# Allegro board 111.brd
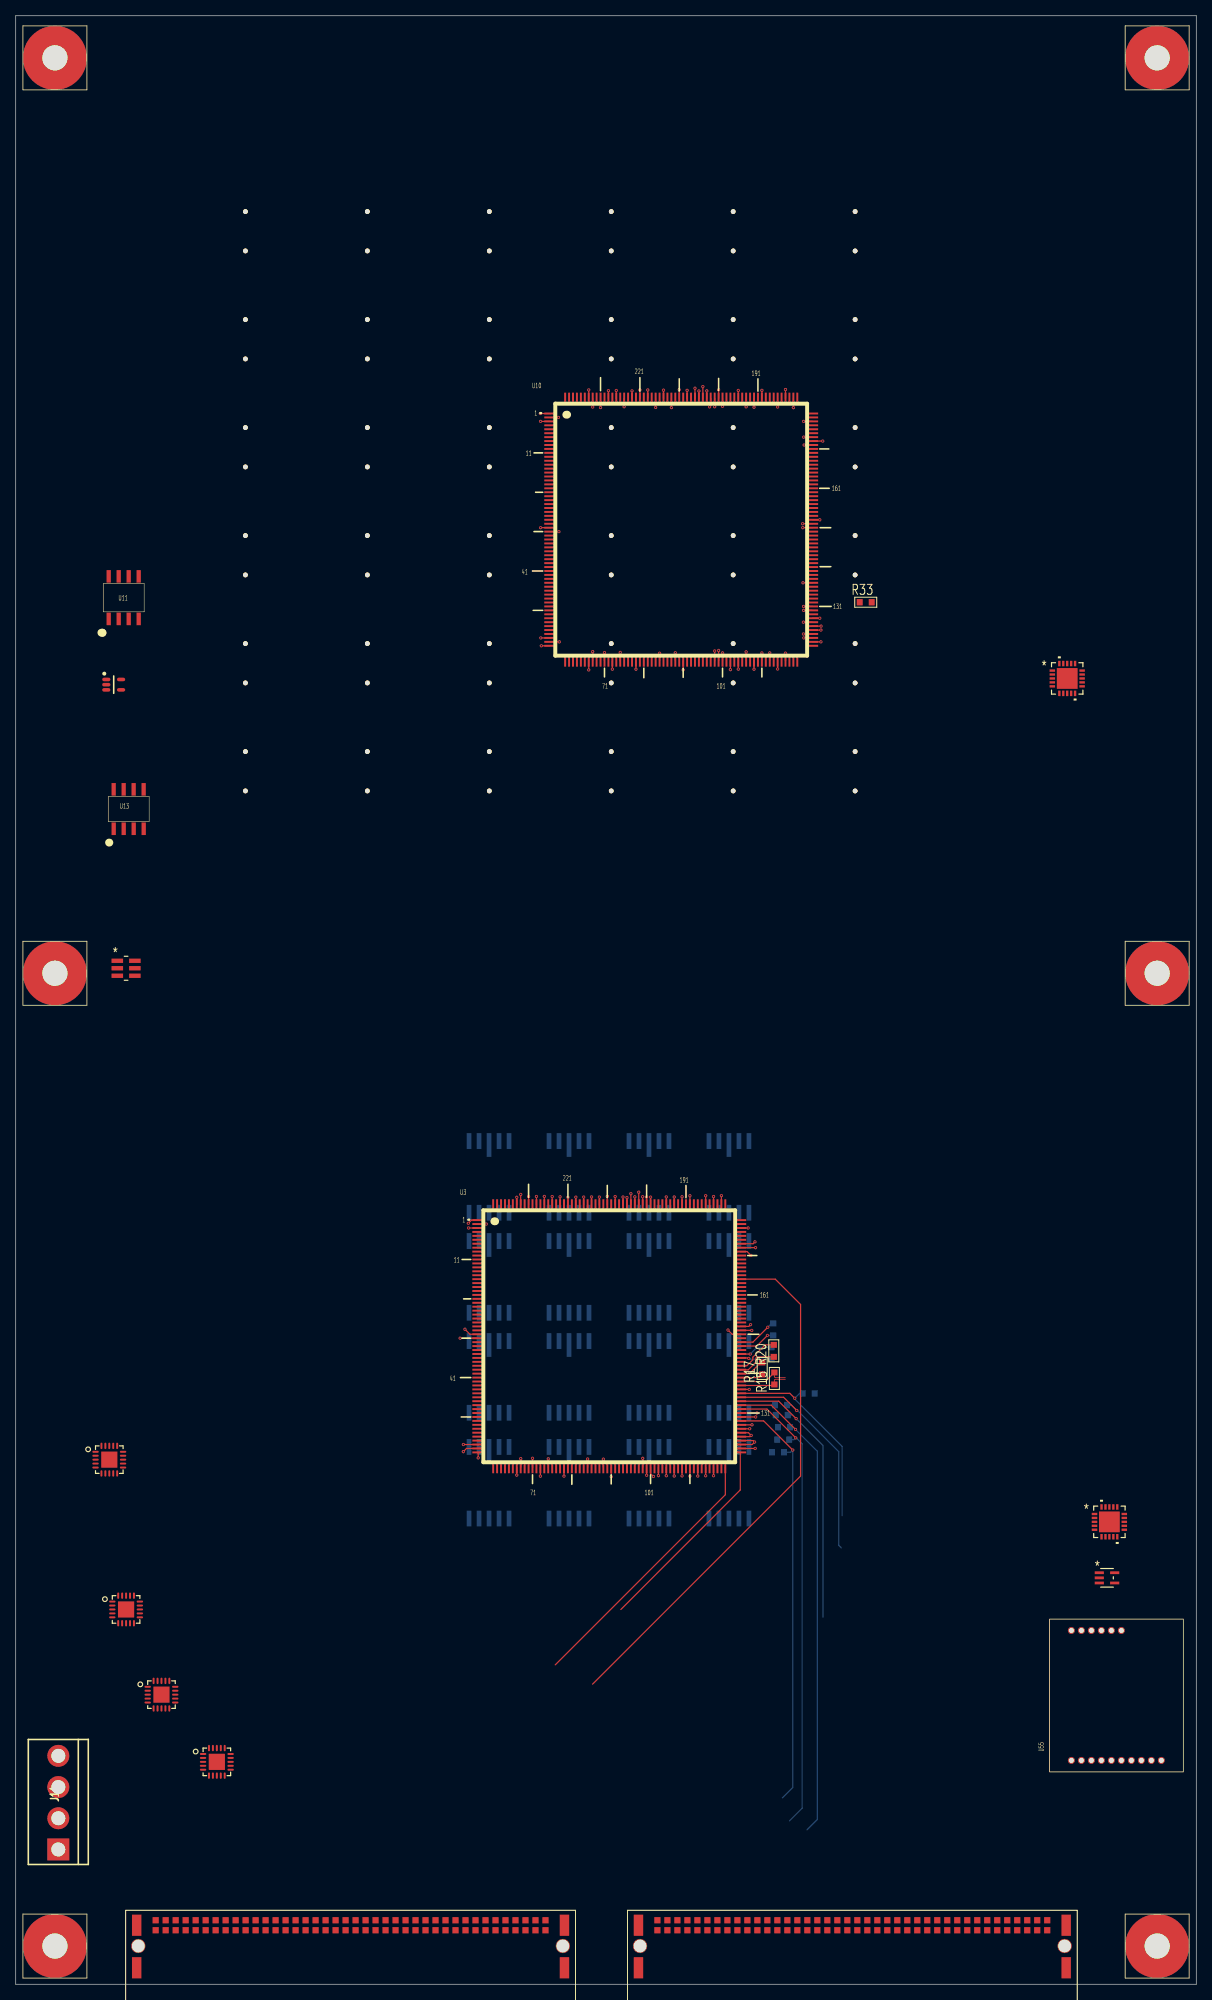
[diagram p0: board, top side]
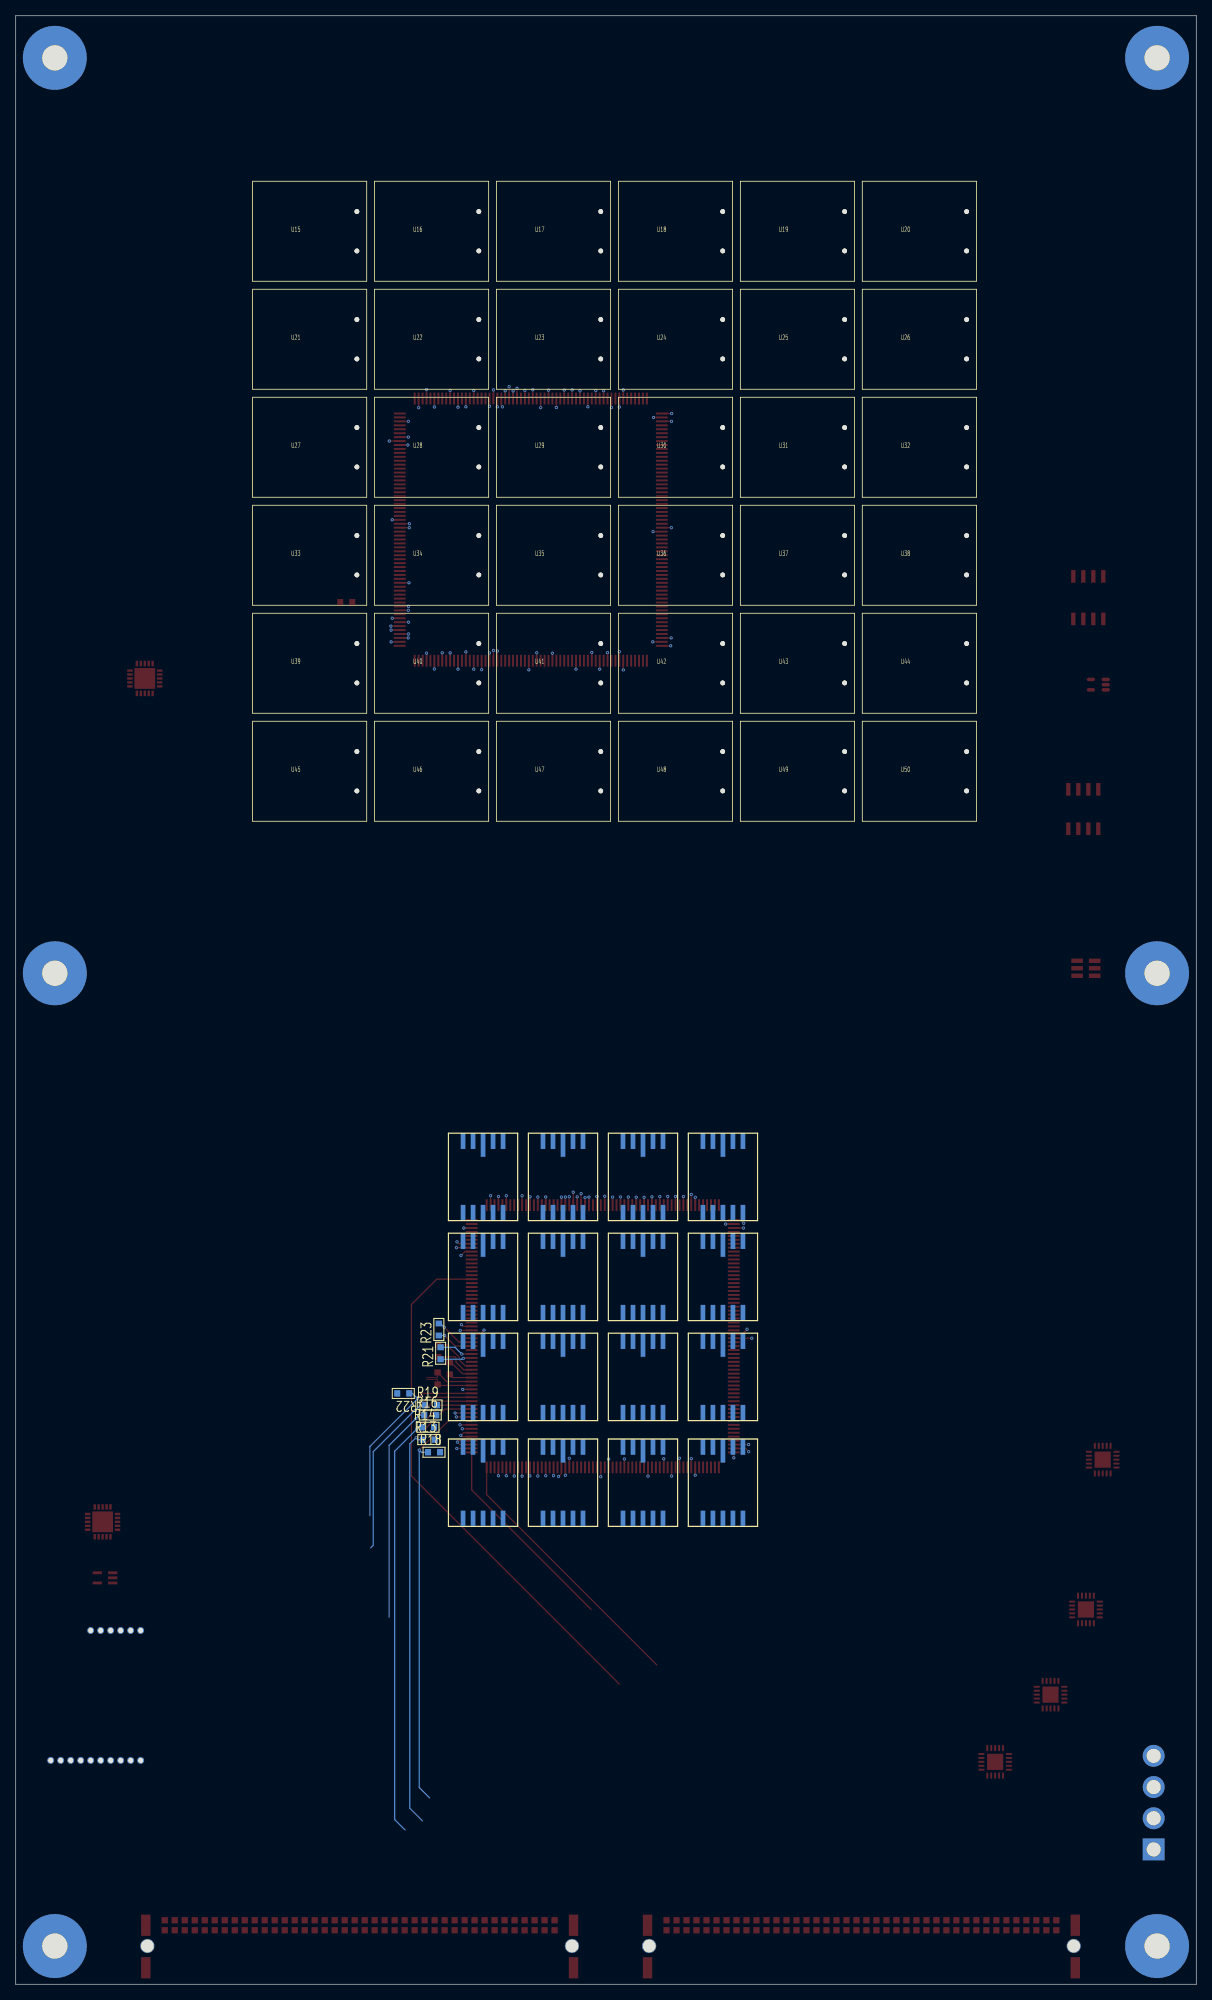
[diagram p1: board, bottom side, seen from below]

Outline 150 x 250 mm; copper layers: TOP, GND2, SIG3, PLANE4, PLANE5, SIG6, GND7, BOTTOM. Coordinates in mm from the lower left corner of the outline.
Outline path: 0,250 0,0 150,0 150,250 0,250

## Design rules (mm)
net group CK_5: nets N36210 N36222
net group CK_40: nets N36234 N36246
net group RAZ_CHN: nets N36138 N36150
net group TRIG_EXT: nets N36186 N36198

## Placement (name value [footprint] x y rotation side)
D1  -  [S5980]  64.54 97.23 180 bottom
D2  -  [S5980]  74.7 97.23 180 bottom
D3  -  [S5980]  84.86 97.23 180 bottom
D4  -  [S5980]  95.02 97.23 180 bottom
D7  -  [S5980]  64.54 84.53 180 bottom
D8  -  [S5980]  74.7 84.53 180 bottom
D9  -  [S5980]  84.86 84.53 180 bottom
D10  -  [S5980]  95.02 84.53 180 bottom
D13  -  [S5980]  64.54 71.83 180 bottom
D14  -  [S5980]  74.7 71.83 180 bottom
D15  -  [S5980]  84.86 71.83 180 bottom
D16  -  [S5980]  95.02 71.83 180 bottom
D17  -  [S5980]  64.54 58.39 180 bottom
D18  -  [S5980]  74.7 58.39 180 bottom
D19  -  [S5980]  84.86 58.39 180 bottom
D20  -  [S5980]  95.02 58.39 180 bottom
J10  CONN  [154744-ERNI]  131.06 6.86 270 top
J11  Power In  [SIP-4P-156]  5.41 23.06 90 top
J12  CONN  [154744-ERNI]  67.31 6.86 270 top
J14  2mm_Hole  [2MM_HOLE]  4.98 4.85 0 top
J15  2mm_Hole  [2MM_HOLE]  145.03 4.85 0 top
J16  2mm_Hole  [2MM_HOLE]  4.98 128.4 0 top
J17  2mm_Hole  [2MM_HOLE]  4.98 244.65 0 top
J18  2mm_Hole  [2MM_HOLE]  145.03 128.4 0 top
J19  2mm_Hole  [2MM_HOLE]  145.03 244.65 0 top
R13  50  [SR0603]  97.51 69.16 180 bottom
R14  50  [SR0603]  97.61 70.74 180 bottom
R15  test  [SR0603]  96.39 76.94 90 top
R16  50  [SR0603]  97.33 72.29 180 bottom
R17  test  [SR0603]  94.84 78.21 90 top
R18  50  [SR0603]  96.85 67.56 180 bottom
R19  50  [SR0603]  97.23 73.56 180 bottom
R20  test  [SR0603]  96.32 80.44 90 top
R21  test  [SR0603]  96.01 80.14 90 bottom
R22  50  [SR0603]  100.76 75.03 0 bottom
R23  test  [SR0603]  96.24 83.16 90 bottom
R33  test  [SR0603]  108 175.51 0 top
U1  Value  [AD7944]  133.6 165.84 0 top
U2  Value  [AD7944]  138.96 58.72 0 top
U3  -  [SKIROC2]  75.41 82.3 0 top
U10  -  [SKIROC2]  84.56 184.73 0 top
U11  TLV5618AM  [TLV5618_D_DFP]  13.72 176.1 0 top
U12  ADG741  [SOT65P210X110-5N]  12.45 165.05 0 top
U13  LM6142AMJ-QML  [LM6142_DFP]  14.35 149.25 0 top
U14  REF3212  [DBV6]  14.02 129.03 0 top
U15  -  [S8650]  106.65 222.63 180 bottom
U16  -  [S8650]  91.16 222.63 180 bottom
U17  -  [S8650]  75.67 222.63 180 bottom
U18  -  [S8650]  60.17 222.63 180 bottom
U19  -  [S8650]  44.68 222.63 180 bottom
U20  -  [S8650]  29.18 222.63 180 bottom
U21  -  [S8650]  106.65 208.91 180 bottom
U22  -  [S8650]  91.16 208.91 180 bottom
U23  -  [S8650]  75.67 208.91 180 bottom
U24  -  [S8650]  60.17 208.91 180 bottom
U25  -  [S8650]  44.68 208.91 180 bottom
U26  -  [S8650]  29.18 208.91 180 bottom
U27  -  [S8650]  106.65 195.2 180 bottom
U28  -  [S8650]  91.16 195.2 180 bottom
U29  -  [S8650]  75.67 195.2 180 bottom
U30  -  [S8650]  60.17 195.2 180 bottom
U31  -  [S8650]  44.68 195.2 180 bottom
U32  -  [S8650]  29.18 195.2 180 bottom
U33  -  [S8650]  106.65 181.48 180 bottom
U34  -  [S8650]  91.16 181.48 180 bottom
U35  -  [S8650]  75.67 181.48 180 bottom
U36  -  [S8650]  60.17 181.48 180 bottom
U37  -  [S8650]  44.68 181.48 180 bottom
U38  -  [S8650]  29.18 181.48 180 bottom
U39  -  [S8650]  106.65 167.77 180 bottom
U40  -  [S8650]  91.16 167.77 180 bottom
U41  -  [S8650]  75.67 167.77 180 bottom
U42  -  [S8650]  60.17 167.77 180 bottom
U43  -  [S8650]  44.68 167.77 180 bottom
U44  -  [S8650]  29.18 167.77 180 bottom
U45  -  [S8650]  106.65 154.05 180 bottom
U46  -  [S8650]  91.16 154.05 180 bottom
U47  -  [S8650]  75.67 154.05 180 bottom
U48  -  [S8650]  60.17 154.05 180 bottom
U49  -  [S8650]  44.68 154.05 180 bottom
U50  -  [S8650]  29.18 154.05 180 bottom
U51  -  [TPS7A85]  11.89 66.62 0 top
U52  -  [TPS7A85]  14.02 47.6 0 top
U53  -  [TPS7A85]  25.55 28.24 0 top
U54  -  [TPS7A85]  18.52 36.78 0 top
U55  C11204-01  [C11204_01]  148.36 26.97 90 top
U56  LM94021  [MAA05A]  138.66 51.61 0 top

## Library data of the parts
D1-D4 D7-D10 D13-D20 = Si_Pin detector
J10 J12 = CONN_1
J11 = 4 HEADER
J14-J19 = 2mm_Hole
R13-R23 R33 = R
U1 U2 = AD7944BCPZ
U3 U10 = SKIROC2
U11 = TLV5618
U12 = ADG741_3: room: MAIN_CH2
U13 = LM6142
U14 = REF3212
U15-U50 = S8650
U51-U54 = TPS7A85
U55 = C11204-01
U56 = LM94021

## Footprints (pads in the part's own frame, mm; a bottom-side part is the same pattern mirrored in y, then rotated)
2MM_HOLE
  round 8.128 hole 3.2: 1(0,0)
154744-ERNI
  rect 2.7x1.199 smd: 1(-0.635,2.41) 2(4.765,2.41) 3(-0.635,-51.94) 4(4.765,-51.94)
  round 1.801 hole 1.6: 5(2,2.21) 6(2,-51.74)
  rect 0.8x0.8 smd: A1(0,0) A2(0,-1.27) A3(0,-2.54) A4(0,-3.81) A5(0,-5.08) A6(0,-6.35) A7(0,-7.62) A8(0,-8.89) A9(0,-10.16) A10(0,-11.43) A11(0,-12.7) A12(0,-13.97) A13(0,-15.24) A14(0,-16.51) A15(0,-17.78) A16(0,-19.05) A17(0,-20.32) A18(0,-21.59) A19(0,-22.86) A20(0,-24.13) A21(0,-25.4) A22(0,-26.67) A23(0,-27.94) A24(0,-29.21) A25(0,-30.48) A26(0,-31.75) A27(0,-33.02) A28(0,-34.29) A29(0,-35.56) A30(0,-36.83) A31(0,-38.1) A32(0,-39.37) A33(0,-40.64) A34(0,-41.91) A35(0,-43.18) A36(0,-44.45) A37(0,-45.72) A38(0,-46.99) A39(0,-48.26) A40(0,-49.53) B1(-1.27,0) B2(-1.27,-1.27) B3(-1.27,-2.54) B4(-1.27,-3.81) B5(-1.27,-5.08) B6(-1.27,-6.35) B7(-1.27,-7.62) B8(-1.27,-8.89) B9(-1.27,-10.16) B10(-1.27,-11.43) B11(-1.27,-12.7) B12(-1.27,-13.97) B13(-1.27,-15.24) B14(-1.27,-16.51) B15(-1.27,-17.78) B16(-1.27,-19.05) B17(-1.27,-20.32) B18(-1.27,-21.59) B19(-1.27,-22.86) B20(-1.27,-24.13) B21(-1.27,-25.4) B22(-1.27,-26.67) B23(-1.27,-27.94) B24(-1.27,-29.21) B25(-1.27,-30.48) B26(-1.27,-31.75) B27(-1.27,-33.02) B28(-1.27,-34.29) B29(-1.27,-35.56) B30(-1.27,-36.83) B31(-1.27,-38.1) B32(-1.27,-39.37) B33(-1.27,-40.64) B34(-1.27,-41.91) B35(-1.27,-43.18) B36(-1.27,-44.45) B37(-1.27,-45.72) B38(-1.27,-46.99) B39(-1.27,-48.26) B40(-1.27,-49.53)
AD7944
  rect 0.701x0.305 smd: 1(-1.892,1.001) 2(-1.892,0.5) 3(-1.892,0) 4(-1.892,-0.5) 5(-1.892,-1.001) 11(1.892,-1.001) 12(1.892,-0.5) 13(1.892,0) 14(1.892,0.5) 15(1.892,1.001)
  rect 0.305x0.701 smd: 6(-1.001,-1.892) 7(-0.5,-1.892) 8(0,-1.892) 9(0.5,-1.892) 10(1.001,-1.892) 16(1.001,1.892) 17(0.5,1.892) 18(0,1.892) 19(-0.5,1.892) 20(-1.001,1.892)
  rect 2.642x2.642 smd: 21(0,0)
C11204_01
  round 0.889 hole 0.635: 1(1.45,2.8) 2(1.45,4.07) 3(1.45,5.34) 4(1.45,6.61) 5(1.45,7.88) 6(1.45,9.15) 7(1.45,10.42) 8(1.45,11.69) 9(1.45,12.96) 10(1.45,14.23) 11(17.95,14.23) 12(17.95,12.96) 13(17.95,11.69) 14(17.95,10.42) 15(17.95,9.15) 16(17.95,7.88)
DBV6
  rect 1.473x0.559 smd: 1(-1.118,0.95) 2(-1.118,0) 3(-1.118,-0.95) 4(1.118,-0.95) 5(1.118,0) 6(1.118,0.95)
LM6142_DFP
  rect 0.55x1.6 smd: 1(-1.905,-2.5) 2(-0.635,-2.5) 3(0.635,-2.5) 4(1.905,-2.5) 5(1.902,2.5) 6(0.632,2.5) 7(-0.638,2.5) 8(-1.908,2.5)
MAA05A
  rect 1.168x0.356 smd: 1(-0.978,0.65) 2(-0.978,0) 3(-0.978,-0.65) 4(0.978,-0.65) 5(0.978,0.65)
S5980
  rect 0.6x2 smd: 1(6.94,9.85) 2(5.67,9.85) 4(3.13,9.85) 5(1.86,9.85) 6(1.86,0.75) 7(3.13,0.75) 8(4.4,0.75) 9(5.67,0.75) 10(6.94,0.75)
  rect 0.6x3 smd: 3(4.4,9.35)
S8650
  round 0.6 hole 0.6: 1(0,-2.5) 2(0,2.5)
SIP-4P-156
  rect 2.794x2.794 hole 1.778: 1(-5.944,0)
  round 2.794 hole 1.778: 2(-1.981,0) 3(1.981,0) 4(5.944,0)
SKIROC2
  rect 1.5x0.25 smd: 1(-16.65,14.75) 2(-16.65,14.25) 3(-16.65,13.75) 4(-16.65,13.25) 5(-16.65,12.75) 6(-16.65,12.25) 7(-16.65,11.75) 8(-16.65,11.25) 9(-16.65,10.75) 10(-16.65,10.25) 11(-16.65,9.75) 12(-16.65,9.25) 13(-16.65,8.75) 14(-16.65,8.25) 15(-16.65,7.75) 16(-16.65,7.25) 17(-16.65,6.75) 18(-16.65,6.25) 19(-16.65,5.75) 20(-16.65,5.25) 21(-16.65,4.75) 22(-16.65,4.25) 23(-16.65,3.75) 24(-16.65,3.25) 25(-16.65,2.75) 26(-16.65,2.25) 27(-16.65,1.75) 28(-16.65,1.25) 29(-16.65,0.75) 30(-16.65,0.25) 31(-16.65,-0.25) 32(-16.65,-0.75) 33(-16.65,-1.25) 34(-16.65,-1.75) 35(-16.65,-2.25) 36(-16.65,-2.75) 37(-16.65,-3.25) 38(-16.65,-3.75) 39(-16.65,-4.25) 40(-16.65,-4.75) 41(-16.65,-5.25) 42(-16.65,-5.75) 43(-16.65,-6.25) 44(-16.65,-6.75) 45(-16.65,-7.25) 46(-16.65,-7.75) 47(-16.65,-8.25) 48(-16.65,-8.75) 49(-16.65,-9.25) 50(-16.65,-9.75) 51(-16.65,-10.25) 52(-16.65,-10.75) 53(-16.65,-11.25) 54(-16.65,-11.75) 55(-16.65,-12.25) 56(-16.65,-12.75) 57(-16.65,-13.25) 58(-16.65,-13.75) 59(-16.65,-14.25) 60(-16.65,-14.75) 121(16.65,-14.75) 122(16.65,-14.25) 123(16.65,-13.75) 124(16.65,-13.25) 125(16.65,-12.75) 126(16.65,-12.25) 127(16.65,-11.75) 128(16.65,-11.25) 129(16.65,-10.75) 130(16.65,-10.25) 131(16.65,-9.75) 132(16.65,-9.25) 133(16.65,-8.75) 134(16.65,-8.25) 135(16.65,-7.75) 136(16.65,-7.25) 137(16.65,-6.75) 138(16.65,-6.25) 139(16.65,-5.75) 140(16.65,-5.25) 141(16.65,-4.75) 142(16.65,-4.25) 143(16.65,-3.75) 144(16.65,-3.25) 145(16.65,-2.75) 146(16.65,-2.25) 147(16.65,-1.75) 148(16.65,-1.25) 149(16.65,-0.75) 150(16.65,-0.25) 151(16.65,0.25) 152(16.65,0.75) 153(16.65,1.25) 154(16.65,1.75) 155(16.65,2.25) 156(16.65,2.75) 157(16.65,3.25) 158(16.65,3.75) 159(16.65,4.25) 160(16.65,4.75) 161(16.65,5.25) 162(16.65,5.75) 163(16.65,6.25) 164(16.65,6.75) 165(16.65,7.25) 166(16.65,7.75) 167(16.65,8.25) 168(16.65,8.75) 169(16.65,9.25) 170(16.65,9.75) 171(16.65,10.25) 172(16.65,10.75) 173(16.65,11.25) 174(16.65,11.75) 175(16.65,12.25) 176(16.65,12.75) 177(16.65,13.25) 178(16.65,13.75) 179(16.65,14.25) 180(16.65,14.75)
  rect 0.25x1.5 smd: 61(-14.75,-16.65) 62(-14.25,-16.65) 63(-13.75,-16.65) 64(-13.25,-16.65) 65(-12.75,-16.65) 66(-12.25,-16.65) 67(-11.75,-16.65) 68(-11.25,-16.65) 69(-10.75,-16.65) 70(-10.25,-16.65) 71(-9.75,-16.65) 72(-9.25,-16.65) 73(-8.75,-16.65) 74(-8.25,-16.65) 75(-7.75,-16.65) 76(-7.25,-16.65) 77(-6.75,-16.65) 78(-6.25,-16.65) 79(-5.75,-16.65) 80(-5.25,-16.65) 81(-4.75,-16.65) 82(-4.25,-16.65) 83(-3.75,-16.65) 84(-3.25,-16.65) 85(-2.75,-16.65) 86(-2.25,-16.65) 87(-1.75,-16.65) 88(-1.25,-16.65) 89(-0.75,-16.65) 90(-0.25,-16.65) 91(0.25,-16.65) 92(0.75,-16.65) 93(1.25,-16.65) 94(1.75,-16.65) 95(2.25,-16.65) 96(2.75,-16.65) 97(3.25,-16.65) 98(3.75,-16.65) 99(4.25,-16.65) 100(4.75,-16.65) 101(5.25,-16.65) 102(5.75,-16.65) 103(6.25,-16.65) 104(6.75,-16.65) 105(7.25,-16.65) 106(7.75,-16.65) 107(8.25,-16.65) 108(8.75,-16.65) 109(9.25,-16.65) 110(9.75,-16.65) 111(10.25,-16.65) 112(10.75,-16.65) 113(11.25,-16.65) 114(11.75,-16.65) 115(12.25,-16.65) 116(12.75,-16.65) 117(13.25,-16.65) 118(13.75,-16.65) 119(14.25,-16.65) 120(14.75,-16.65) 181(14.75,16.65) 182(14.25,16.65) 183(13.75,16.65) 184(13.25,16.65) 185(12.75,16.65) 186(12.25,16.65) 187(11.75,16.65) 188(11.25,16.65) 189(10.75,16.65) 190(10.25,16.65) 191(9.75,16.65) 192(9.25,16.65) 193(8.75,16.65) 194(8.25,16.65) 195(7.75,16.65) 196(7.25,16.65) 197(6.75,16.65) 198(6.25,16.65) 199(5.75,16.65) 200(5.25,16.65) 201(4.75,16.65) 202(4.25,16.65) 203(3.75,16.65) 204(3.25,16.65) 205(2.75,16.65) 206(2.25,16.65) 207(1.75,16.65) 208(1.25,16.65) 209(0.75,16.65) 210(0.25,16.65) 211(-0.25,16.65) 212(-0.75,16.65) 213(-1.25,16.65) 214(-1.75,16.65) 215(-2.25,16.65) 216(-2.75,16.65) 217(-3.25,16.65) 218(-3.75,16.65) 219(-4.25,16.65) 220(-4.75,16.65) 221(-5.25,16.65) 222(-5.75,16.65) 223(-6.25,16.65) 224(-6.75,16.65) 225(-7.25,16.65) 226(-7.75,16.65) 227(-8.25,16.65) 228(-8.75,16.65) 229(-9.25,16.65) 230(-9.75,16.65) 231(-10.25,16.65) 232(-10.75,16.65) 233(-11.25,16.65) 234(-11.75,16.65) 235(-12.25,16.65) 236(-12.75,16.65) 237(-13.25,16.65) 238(-13.75,16.65) 239(-14.25,16.65) 240(-14.75,16.65)
SOT65P210X110-5N
  oval 1.041x0.457 smd: 1(-0.94,0.66) 2(-0.94,0) 3(-0.94,-0.66) 4(0.94,-0.66) 5(0.94,0.66)
SR0603
  rect 0.762x0.813 smd: 1(-0.762,0) 2(0.762,0)
TLV5618_D_DFP
  rect 0.55x1.6 smd: 1(-1.905,-2.7) 2(-0.635,-2.7) 3(0.635,-2.7) 4(1.905,-2.7) 5(1.905,2.7) 6(0.635,2.7) 7(-0.635,2.7) 8(-1.905,2.7)
TPS7A85
  oval 0.813x0.254 smd: 1(-1.75,1) 2(-1.75,0.5) 3(-1.75,0) 4(-1.75,-0.5) 5(-1.75,-1) 11(1.75,-1) 12(1.75,-0.5) 13(1.75,0) 14(1.75,0.5) 15(1.75,1)
  oval 0.254x0.813 smd: 6(-1,-1.75) 7(-0.5,-1.75) 8(0,-1.75) 9(0.5,-1.75) 10(1,-1.75) 16(1,1.75) 17(0.5,1.75) 18(0,1.75) 19(-0.5,1.75) 20(-1,1.75)
  rect 2.057x2.057 smd: 21(0,0)

## Nets
3.3V_A: U3.73(VDD_BG) U3.79(VDD_DAC) U3.91(VDD_TDC) U3.103(VDD_4BIT) U3.105(VDD_ADC) U3.115(VDD_DISCADC) U3.190(VDD_GS) U3.196(VDD_TRIGGER) U3.204(VDD_SCA) U3.213(VDD_FS) U3.217(VDD_AMP10) U3.223(VDD_SS10) U3.227(VDD_SS1) U10.73(VDD_BG) U10.79(VDD_DAC) U10.91(VDD_TDC) U10.103(VDD_4BIT) U10.105(VDD_ADC) U10.115(VDD_DISCADC) U10.190(VDD_GS) U10.196(VDD_TRIGGER) U10.204(VDD_SCA) U10.213(VDD_FS) U10.217(VDD_AMP10) U10.223(VDD_SS10) U10.227(VDD_SS1) U52.1(OUT#1) U52.19(OUT#19) U52.20(OUT#20)
3.3V_D: U3.109(VDDD_DELAY) U3.125(VDDD_TDC) U3.126(VDDD#126) U3.128(VDDD#128) U3.153(VDDD#153) U3.173(VDD) U3.184(VDD_SC) U3.205(VDDD_SCA) U10.109(VDDD_DELAY) U10.125(VDDD_TDC) U10.126(VDDD#126) U10.128(VDDD#128) U10.153(VDDD#153) U10.173(VDD) U10.184(VDD_SC) U10.205(VDDD_SCA) U11.8(VDD) U12.5(VDD) U13.8(V+) U53.1(OUT#1) U53.19(OUT#19) U53.20(OUT#20)
3.3V_PA: U3.1(VDDA_PA#1) U3.3(VDDA_PA#3) U3.30(VDDA_PA#30) U3.58(VDDA_PA#58) U3.60(VDDA_PA#60) U3.67(VDDA_PA#67) U3.229(VDD_PA) U3.234(VDDA_PA#234) U10.1(VDDA_PA#1) U10.3(VDDA_PA#3) U10.30(VDDA_PA#30) U10.58(VDDA_PA#58) U10.60(VDDA_PA#60) U10.67(VDDA_PA#67) U10.229(VDD_PA) U10.234(VDDA_PA#234) U51.1(OUT#1) U51.19(OUT#19) U51.20(OUT#20)
+1.25V_REF: U11.6(REF) U14.5(OUT1) U14.6(OUT2)
+2.5V_A: R13.2 R14.2 R16.2 R18.2 R19.2 R22.2 U1.8(VIO) U1.11(DVDD) U1.15(TURBO) U1.16(AVDD) U2.8(VIO) U2.11(DVDD) U2.15(TURBO) U2.16(AVDD) U14.3(EN) U14.4(IN) U54.1(OUT#1) U54.19(OUT#19) U54.20(OUT#20)
+5V: U1.19(BVDD) U2.19(BVDD) U51.14(EN) U51.15(IN#15) U51.16(IN#16) U51.17(IN#17) U52.14(EN) U52.15(IN#15) U52.16(IN#16) U52.17(IN#17) U53.14(EN) U53.15(IN#15) U53.16(IN#16) U53.17(IN#17) U54.14(EN) U54.15(IN#15) U54.16(IN#16) U54.17(IN#17) U55.1(VCC)
GND: J10.1(GND#1) J10.2(GND#2) J10.3(GND#3) J10.4(GND#4) J10.5(GND#5) J10.6(GND#6) J10.A1 J10.A3 J10.A5 J10.A7 J10.A9 J10.A11 J10.A13 J10.A16 J10.A19 J10.A21 J10.A23 J10.A25 J10.A27 J10.A29 J10.A31 J10.A32 J10.A35 J10.A36 J10.A39 J10.A40 J10.B2 J10.B4 J10.B6 J10.B8 J10.B10 J10.B12 J10.B13 J10.B14 J10.B17 J10.B18 J10.B20 J10.B22 J10.B24 J10.B26 J10.B28 J10.B30 J10.B33 J10.B34 J10.B37 J10.B38 J11.1 J11.4 J12.1(GND#1) J12.2(GND#2) J12.3(GND#3) J12.4(GND#4) J12.5(GND#5) J12.6(GND#6) J12.A1 J12.A3 J12.A5 J12.A7 J12.A9 J12.A11 J12.A13 J12.A15 J12.A17 J12.A19 J12.A21 J12.A23 J12.A25 J12.A27 J12.A29 J12.A31 J12.A33 J12.A35 J12.A37 J12.A39 J12.B2 J12.B4 J12.B6 J12.B8 J12.B10 J12.B12 J12.B14 J12.B16 J12.B18 J12.B20 J12.B22 J12.B24 J12.B26 J12.B28 J12.B30 J12.B32 J12.B34 J12.B36 J12.B38 J12.B40 J14.1(GND) J15.1(GND) J16.1(GND) J17.1(GND) J18.1(GND) J19.1(GND) U1.3(REGGND) U1.4(REGGND_1) U1.5(IN-) U1.10(DGND) U1.17(AGND) U1.18(AGND_1) U1.21(EP) U2.3(REGGND) U2.4(REGGND_1) U2.5(IN-) U2.10(DGND) U2.17(AGND) U2.18(AGND_1) U2.21(EP) U3.2(VSSI#2) U3.31(VSSI#31) U3.59(VSSI#59) U3.68(VSSA#68) U3.71(GND_PA#71) U3.75(GND_BG) U3.85(GND_DAC) U3.89(GND_TDC) U3.99(VSSA#99) U3.100(VSSM#100) U3.101(GND_4BIT) U3.107(GND_ADC) U3.111(GNDD_DELAY) U3.113(VSSM#113) U3.117(GND_DISCADC) U3.122(VSSM#122) U3.123(VSSD#123) U3.124(GNDD_TDC) U3.127(VSSD#127) U3.130(GNDD_TEST) U3.131(RTN#131) U3.137(RTN#137) U3.151(VSSD) U3.152(GNDD) U3.174(VSSD#174) U3.178(VSSD#178) U3.182(GND_SC) U3.186(VSSM#186) U3.192(GND_GS) U3.194(GND_TRIGGER) U3.200(GND_TEST) U3.201(VSSM#201) U3.202(VSSA#202) U3.206(GNDD_SCA) U3.207(GND_SCA) U3.209(GND_CAPA_SCA_T) U3.211(GND_CAPA_SCA) U3.215(GND_FS) U3.219(GND_AMP10) U3.221(GND_SS10) U3.225(GND_SS1) U3.231(GND_PA#231) U3.233(VSSA#233) U10.2(VSSI#2) U10.31(VSSI#31) U10.59(VSSI#59) U10.68(VSSA#68) U10.71(GND_PA#71) U10.75(GND_BG) U10.85(GND_DAC) U10.89(GND_TDC) U10.99(VSSA#99) U10.100(VSSM#100) U10.101(GND_4BIT) U10.107(GND_ADC) U10.111(GNDD_DELAY) U10.113(VSSM#113) U10.117(GND_DISCADC) U10.122(VSSM#122) U10.123(VSSD#123) U10.124(GNDD_TDC) U10.127(VSSD#127) U10.130(GNDD_TEST) U10.131(RTN#131) U10.137(RTN#137) U10.151(VSSD) U10.152(GNDD) U10.174(VSSD#174) U10.178(VSSD#178) U10.182(GND_SC) U10.186(VSSM#186) U10.192(GND_GS) U10.194(GND_TRIGGER) U10.200(GND_TEST) U10.201(VSSM#201) U10.202(VSSA#202) U10.206(GNDD_SCA) U10.207(GND_SCA) U10.209(GND_CAPA_SCA_T) U10.211(GND_CAPA_SCA) U10.215(GND_FS) U10.219(GND_AMP10) U10.221(GND_SS10) U10.225(GND_SS1) U10.231(GND_PA#231) U10.233(VSSA#233) U11.5(AGND) U12.3(GND) U13.4(V-) U14.1(GND1) U14.2(GND2) U51.8(GND#8) U51.18(GND#18) U51.21(THERMALPAD) U52.8(GND#8) U52.18(GND#18) U52.21(THERMALPAD) U53.8(GND#8) U53.18(GND#18) U53.21(THERMALPAD) U54.8(GND#8) U54.9(400MV) U54.10(800MV) U54.18(GND#18) U54.21(THERMALPAD) U55.2(GND#2) U55.5(GND#5) U55.8(GND#8) U55.15(GND#15) U56.1(GS0) U56.2(GND) U56.5(GS1)
VDD_TEST: U3.203(VDD_TEST) U10.203(VDD_TEST)
VDDD_TEST: U3.172(VDDD_TEST) U10.172(VDDD_TEST)
A_PROBE_SKIROC1: U3.179(A_PROBE)
A_PROBE_SKIROC_2: U10.179(A_PROBE)
CALI_VOL: U12.1(IN)
DACOUTA: U13.3(+INA)
HV_30V: D1.3(CATHODE COMMON) D3.3(CATHODE COMMON) D4.3(CATHODE COMMON) D7.3(CATHODE COMMON) D8.3(CATHODE COMMON) D9.3(CATHODE COMMON) D10.3(CATHODE COMMON) D13.3(CATHODE COMMON) D14.3(CATHODE COMMON) D15.3(CATHODE COMMON) D16.3(CATHODE COMMON) D17.3(CATHODE COMMON) D18.3(CATHODE COMMON) D19.3(CATHODE COMMON) D20.3(CATHODE COMMON)
HV_SIPIN: U15.2(ANODE) U16.2(ANODE) U17.2(ANODE) U18.2(ANODE) U19.2(ANODE) U20.2(ANODE) U21.2(ANODE) U22.2(ANODE) U23.2(ANODE) U24.2(ANODE) U25.2(ANODE) U26.2(ANODE) U27.2(ANODE) U28.2(ANODE) U29.2(ANODE) U30.2(ANODE) U31.2(ANODE) U32.2(ANODE) U33.2(ANODE) U34.2(ANODE) U35.2(ANODE) U36.2(ANODE) U37.2(ANODE) U38.2(ANODE) U39.2(ANODE) U40.2(ANODE) U41.2(ANODE) U42.2(ANODE) U43.2(ANODE) U44.2(ANODE) U45.2(ANODE) U46.2(ANODE) U47.2(ANODE) U48.2(ANODE) U49.2(ANODE) U50.2(ANODE)
IBI_PA_SKIROC1: U3.228(IBI_PA)
IBI_PA_SKIROC_2: U10.228(IBI_PA)
IN_ADC_EXT_SKIROC1: U3.183(IN_ADC_EXT)
IN_ADC_EXT_SKIROC_2: U10.183(IN_ADC_EXT)
SK1_CHN0: D1.10(ANODE A)
SK1_CHN1: D1.1(ANODE B)
SK1_CHN2: D1.5(ANODE C)
SK1_CHN3: D1.6(ANODE D)
SK1_CHN4: D2.10(ANODE A)
SK1_CHN5: D2.1(ANODE B)
SK1_CHN6: D2.5(ANODE C)
SK1_CHN7: D2.6(ANODE D)
SK1_CHN8: D3.10(ANODE A)
SK1_CHN9: D3.1(ANODE B)
SK1_CHN10: D3.5(ANODE C)
SK1_CHN11: D3.6(ANODE D)
SK1_CHN12: D4.10(ANODE A)
SK1_CHN13: D4.1(ANODE B)
SK1_CHN14: D4.5(ANODE C)
SK1_CHN15: D4.6(ANODE D)
SK1_CHN16: D7.10(ANODE A)
SK1_CHN17: D7.1(ANODE B)
SK1_CHN18: D7.5(ANODE C)
SK1_CHN19: D7.6(ANODE D)
SK1_CHN20: D8.10(ANODE A)
SK1_CHN21: D8.1(ANODE B)
SK1_CHN22: D8.5(ANODE C)
SK1_CHN23: D8.6(ANODE D)
SK1_CHN24: D9.10(ANODE A)
SK1_CHN25: D9.1(ANODE B)
SK1_CHN26: D9.5(ANODE C)
SK1_CHN27: D9.6(ANODE D)
SK1_CHN28: D10.10(ANODE A)
SK1_CHN29: D10.1(ANODE B)
SK1_CHN30: D10.5(ANODE C)
SK1_CHN31: D10.6(ANODE D)
SK1_CHN32: D13.10(ANODE A)
SK1_CHN33: D13.1(ANODE B)
SK1_CHN34: D13.5(ANODE C)
SK1_CHN35: D13.6(ANODE D)
SK1_CHN36: D14.10(ANODE A)
SK1_CHN37: D14.1(ANODE B)
SK1_CHN38: D14.5(ANODE C)
SK1_CHN39: D14.6(ANODE D)
SK1_CHN40: D15.10(ANODE A)
SK1_CHN41: D15.1(ANODE B)
SK1_CHN42: D15.5(ANODE C)
SK1_CHN43: D15.6(ANODE D)
SK1_CHN44: D16.10(ANODE A)
SK1_CHN45: D16.1(ANODE B)
SK1_CHN46: D16.5(ANODE C)
SK1_CHN47: D16.6(ANODE D)
SK1_CHN48: D17.10(ANODE A)
SK1_CHN49: D17.1(ANODE B)
SK1_CHN50: D17.5(ANODE C)
SK1_CHN51: D17.6(ANODE D)
SK1_CHN52: D18.10(ANODE A)
SK1_CHN53: D18.1(ANODE B)
SK1_CHN54: D18.5(ANODE C)
SK1_CHN55: D18.6(ANODE D)
SK1_CHN56: D19.10(ANODE A)
SK1_CHN57: D19.1(ANODE B)
SK1_CHN58: D19.5(ANODE C)
SK1_CHN59: D19.6(ANODE D)
SK1_CHN60: D20.10(ANODE A)
SK1_CHN61: D20.1(ANODE B)
SK1_CHN62: D20.5(ANODE C)
SK1_CHN63: D20.6(ANODE D)
SK1_INPUT1: U3.235(IN_0)
SK1_INPUT2: U3.236(IN_1)
SK1_INPUT3: U3.237(IN_2)
SK1_INPUT4: U3.238(IN_3)
SK1_INPUT5: U3.239(IN_4)
SK1_INPUT6: U3.240(IN_5)
SK1_INPUT7: U3.4(IN_6)
SK1_INPUT8: U3.5(IN_7)
SK1_INPUT9: U3.6(IN_8)
SK1_INPUT10: U3.7(IN_9)
SK1_INPUT11: U3.8(IN_10)
SK1_INPUT12: U3.9(IN_11)
SK1_INPUT13: U3.10(IN_12)
SK1_INPUT14: U3.11(IN_13)
SK1_INPUT15: U3.12(IN_14)
SK1_INPUT16: U3.13(IN_15)
SK1_INPUT17: U3.14(IN_16)
SK1_INPUT18: U3.15(IN_17)
SK1_INPUT19: U3.16(IN_18)
SK1_INPUT20: U3.17(IN_19)
SK1_INPUT21: U3.18(IN_20)
SK1_INPUT22: U3.19(IN_21)
SK1_INPUT23: U3.20(IN_22)
SK1_INPUT24: U3.21(IN_23)
SK1_INPUT25: U3.22(IN_24)
SK1_INPUT26: U3.23(IN_25)
SK1_INPUT27: U3.24(IN_26)
SK1_INPUT28: U3.25(IN_27)
SK1_INPUT29: U3.26(IN_28)
SK1_INPUT30: U3.27(IN_29)
SK1_INPUT31: U3.28(IN_30)
SK1_INPUT32: U3.29(IN_31)
SK1_INPUT33: U3.32(IN_32)
SK1_INPUT34: U3.33(IN_33)
SK1_INPUT35: U3.34(IN_34)
SK1_INPUT36: U3.35(IN_35)
SK1_INPUT_CHN63: U3.65(IN_62)
SK1_V_BG: U3.77(V_BG)
SK1_VTH0: U3.104(VTH0)
SK1_VTH1: U3.112(VTH1)
SK2_CHN0: U15.1(CATHODE)
SK2_CHN1: U16.1(CATHODE)
SK2_CHN2: U17.1(CATHODE)
SK2_CHN3: U18.1(CATHODE)
SK2_CHN4: U19.1(CATHODE)
SK2_CHN5: U20.1(CATHODE)
SK2_CHN6: U21.1(CATHODE)
SK2_CHN7: U22.1(CATHODE)
SK2_CHN8: U23.1(CATHODE)
SK2_CHN9: U24.1(CATHODE)
SK2_CHN10: U25.1(CATHODE)
SK2_CHN11: U26.1(CATHODE)
SK2_CHN12: U27.1(CATHODE)
SK2_CHN13: U28.1(CATHODE)
SK2_CHN14: U29.1(CATHODE)
SK2_CHN15: U30.1(CATHODE)
SK2_CHN16: U31.1(CATHODE)
SK2_CHN17: U32.1(CATHODE)
SK2_CHN18: U33.1(CATHODE)
SK2_CHN19: U34.1(CATHODE)
SK2_CHN20: U35.1(CATHODE)
SK2_CHN21: U36.1(CATHODE)
SK2_CHN22: U37.1(CATHODE)
SK2_CHN23: U38.1(CATHODE)
SK2_CHN24: U39.1(CATHODE)
SK2_CHN25: U40.1(CATHODE)
SK2_CHN26: U41.1(CATHODE)
SK2_CHN27: U42.1(CATHODE)
SK2_CHN28: U43.1(CATHODE)
SK2_CHN29: U44.1(CATHODE)
SK2_CHN30: U45.1(CATHODE)
SK2_CHN31: U46.1(CATHODE)
SK2_CHN32: U47.1(CATHODE)
SK2_CHN33: U48.1(CATHODE)
SK2_CHN34: U49.1(CATHODE)
SK2_CHN35: U50.1(CATHODE)
SK2_INPUT1: U10.235(IN_0)
SK2_INPUT2: U10.236(IN_1)
SK2_INPUT3: U10.237(IN_2)
SK2_INPUT4: U10.238(IN_3)
SK2_INPUT5: U10.239(IN_4)
SK2_INPUT6: U10.240(IN_5)
SK2_INPUT7: U10.4(IN_6)
SK2_INPUT8: U10.5(IN_7)
SK2_INPUT9: U10.6(IN_8)
SK2_INPUT10: U10.7(IN_9)
SK2_INPUT11: U10.8(IN_10)
SK2_INPUT12: U10.9(IN_11)
SK2_INPUT13: U10.10(IN_12)
SK2_INPUT14: U10.11(IN_13)
SK2_INPUT15: U10.12(IN_14)
SK2_INPUT16: U10.13(IN_15)
SK2_INPUT17: U10.14(IN_16)
SK2_INPUT18: U10.15(IN_17)
SK2_INPUT19: U10.16(IN_18)
SK2_INPUT20: U10.17(IN_19)
SK2_INPUT21: U10.18(IN_20)
SK2_INPUT22: U10.19(IN_21)
SK2_INPUT23: U10.20(IN_22)
SK2_INPUT24: U10.21(IN_23)
SK2_INPUT25: U10.22(IN_24)
SK2_INPUT26: U10.23(IN_25)
SK2_INPUT27: U10.24(IN_26)
SK2_INPUT28: U10.25(IN_27)
SK2_INPUT29: U10.26(IN_28)
SK2_INPUT30: U10.27(IN_29)
SK2_INPUT31: U10.28(IN_30)
SK2_INPUT32: U10.29(IN_31)
SK2_INPUT33: U10.32(IN_32)
SK2_INPUT34: U10.33(IN_33)
SK2_INPUT35: U10.34(IN_34)
SK2_INPUT36: U10.35(IN_35)
SK2_INPUT_CHN63: U10.65(IN_62)
SK2_V_BG: U10.77(V_BG)
SK2_VTH0: U10.104(VTH0)
SK2_VTH1: U10.112(VTH1)
SUPPLY_5.0V: J12.B11 J12.B13
VA_PA_SKIROC1: U3.74(VA_PA)
VA_PA_SKIROC_2: U10.74(VA_PA)
VG_PA_SKIROC1: U3.72(VG_PA)
VG_PA_SKIROC_2: U10.72(VG_PA)
VREF1_FS_SKIROC1: U3.87(VREF1_FS)
VREF1_FS_SKIROC_2: U10.87(VREF1_FS)
VREF1_SS10_SKIROC1: U3.82(VREF1_SS10)
VREF1_SS10_SKIROC_2: U10.82(VREF1_SS10)
VREF2_FS_SKIROC1: U3.88(VREF2_FS)
VREF2_FS_SKIROC_2: U10.88(VREF2_FS)
VREF2_SS10_SKIROC1: U3.83(VREF2_SS10)
VREF2_SS10_SKIROC_2: U10.83(VREF2_SS10)
VREF_ADC_SKIROC1: U3.106(VREF_ADC)
VREF_ADC_SKIROC_2: U10.106(VREF_ADC)
VREF_DAC_SKIROC1: U3.86(VREF_DAC)
VREF_DAC_SKIROC_2: U10.86(VREF_DAC)
VREF_SS1_SKIROC1: U3.81(VREF_SS1)
VREF_SS1_SKIROC_2: U10.81(VREF_SS1)
VREF_TDC_SKIROC1: U3.96(VREF_TDC)
VREF_TDC_SKIROC_2: U10.96(VREF_TDC)
VSLOPE_ADC_SKIROC1: U3.110(VSLOPE_ADC)
VSLOPE_ADC_SKIROC_2: U10.110(VSLOPE_ADC)
VSLOPE_TDC_SKIROC1: U3.97(VSLOPE_TDC)
VSLOPE_TDC_SKIROC_2: U10.97(VSLOPE_TDC)
N00496: U1.1(REF) U1.2(REF_1)
N003645: U2.6(IN+)
N003646: U2.7(PDREF)
N12893: J12.A26 U3.167(SR_IN)
N16139: U3.163(SR_OUT) U10.167(SR_IN)
N16143: U3.175(SROUT_READ) U10.176(SRIN_READ)
N16156: U3.158(END_READOUT2) U10.154(START_READOUT2)
N16160: U3.159(END_READOUT1) U10.155(START_READOUT1)
N31908: J12.A24 U3.176(SRIN_READ)
N31912: J12.A32 U3.154(START_READOUT2)
N31916: J12.B33 U3.155(START_READOUT1)
N32240: J12.A28 U3.165(SR_CK) U10.165(SR_CK)
N32262: J12.B27 U3.166(SR_RSTB) U10.166(SR_RSTB)
N32286: J12.B23 U3.177(CK_READ) U10.177(CK_READ)
N32311: J12.A20 U3.170(PWR_ON_ADC) U10.170(PWR_ON_ADC)
N32333: J12.B21 U3.171(PWR_ON_A) U10.171(PWR_ON_A)
N32358: J12.A18 U3.168(PWR_ON_D) U10.168(PWR_ON_D)
N32370: J12.B19 U3.169(PWR_ON_DAC) U10.169(PWR_ON_DAC)
N32417: J12.B39 U3.121(START_RAMPB_ADC_EXT) U10.121(START_RAMPB_ADC_EXT)
N32439: J12.A40 U3.120(START_RAMP_TDC_EXT) U10.120(START_RAMP_TDC_EXT)
N32451: J12.A38 J12.B37 U3.144(START_ACQ) U10.144(START_ACQ)
N32463: J12.A34 J12.B35 U3.150(START_CONVB) U10.150(START_CONVB)
N32475: J12.A30 U3.157(HOLD) U10.157(HOLD)
N32487: J12.B29 U3.164(SELECT) U10.164(SELECT)
N32529: J12.B17 U3.208(RSTB_PA) U10.208(RSTB_PA)
N32541: J12.B31 U3.156(RESETB) U10.156(RESETB)
N32553: J12.A36 U3.147(CK40_TEST) U10.147(CK40_TEST)
N32565: J10.B25 R19.1 U3.135(TRANSMITON_1B) U10.135(TRANSMITON_1B)
N32577: J10.A24 R16.1 U3.134(TRANSMITON_2B) U10.134(TRANSMITON_2B)
N32589: J10.B19 R22.1 U3.136(CHIPSATB) U10.136(CHIPSATB)
N32601: J10.A20 R14.1 U3.133(DOUT_1B) U10.133(DOUT_1B)
N32613: J10.B21 R13.1 U3.132(DOUT_2B) U10.132(DOUT_2B)
N32625: J10.A28 R18.1 U3.129(TRIG_OUTB) U10.129(TRIG_OUTB)
N36138: J10.B31 R15.2 R33.2 U3.139(RAZ_CHN_N) U10.139(RAZ_CHN_N)
N36150: J10.B32 R15.1 R33.1 U3.138(RAZ_CHN_P) U10.138(RAZ_CHN_P)
N36162: J10.B35 R20.2 U3.143(VAL_EVT_N) U10.143(VAL_EVT_N)
N36174: J10.B36 R20.1 U3.142(VAL_EVT_P) U10.142(VAL_EVT_P)
N36186: J10.A33 R17.2 U3.141(TRIG_EXT_N) U10.141(TRIG_EXT_N)
N36198: J10.A34 R17.1 U3.140(TRIG_EXT_P) U10.140(TRIG_EXT_P)
N36210: J10.B39 R23.2 U3.149(CK_5N) U10.149(CK_5N)
N36222: J10.B40 R23.1 U3.148(CK_5P) U10.148(CK_5P)
N36234: J10.A37 R21.2 U3.146(CK_40N) U10.146(CK_40N)
N36246: J10.A38 R21.1 U3.145(CK_40P) U10.145(CK_40P)
N36265: J10.A26 U3.161(DIGITAL_PROB2)
N36273: J10.B27 U3.162(DIGITAL_PROB1)
N40149: J10.B9 U10.161(DIGITAL_PROB2)
N40157: J10.B11 U10.162(DIGITAL_PROB1)
N42215: J10.A30 U10.159(END_READOUT1)
N43952: J10.B29 U10.158(END_READOUT2)
N43974: J10.B23 U10.175(SROUT_READ)
N44287: J10.A12 U10.163(SR_OUT)
N45217: J12.B15 U55.4(TXD)
N45221: J12.A16 U55.3(RXD)
N49750: U3.181(ANALOG_OUT)
N49762: U10.181(ANALOG_OUT)
N50560: J12.A10
N51904: U3.69(C_TEST/IN_CALI_1) U3.70(C_TEST/IN_CALI_2) U10.69(C_TEST/IN_CALI_1) U10.70(C_TEST/IN_CALI_2)
N53777: J12.B5 U11.2(SCLK)
N54089: J12.A14 U11.3(/CS)
N54403: J12.B7 U11.1(DIN)
N54719: J12.A12 U12.4(OE)
N58137: J10.A18 U1.13(CNV) U2.13(CNV)
N58204: J10.A17 U1.12(SCL) U2.12(SCL)
N58224: J10.A15 U1.14(SDI) U2.14(SDI)
N58250: J10.B15 U2.9(SDO)
N58297: J10.B16 U1.9(SDO)
N10356492: U11.4(OUTA)
N10356962: U13.2(-INA)
N10356994: U13.1(OUTA)
N16582339: U1.20(REFIN)
N16582955: U2.1(REF) U2.2(REF_1)
N16583001: U2.20(REFIN)
N16613215: U3.98(NC)
N16619969: U10.98(NC)
N16624092: D2.3(CATHODE COMMON)
N16777049: U55.10(VO)
N16777161: U55.16(TEMP)
N16777199: U56.3(OUT)
N16777223: U56.4(VDD)
N16778577: U51.3(FB)
N16778673: U51.12(BIAS)
N16780006: U53.3(FB)
N16780102: U53.12(BIAS)
N16780621: U54.3(FB)
N16780717: U54.12(BIAS)
N16782855: U52.3(FB)
N16782951: U52.12(BIAS)
N16789655: U54.2(SNS)
N16789656: U54.4(PG)
N16789657: U54.5(50MV)
N16789658: U54.6(100MV) U54.7(200MV)
N16789659: U54.11(1.6V)
N16789660: U54.13(NR/SS)
N103566341: U12.2(OUT)
N165822600: U1.7(PDREF)
N165824200: U1.6(IN+)
N167779161: J11.2
N167779162: J11.3
N167784501: U51.2(SNS)
N167784610: U51.6(100MV)
N167784690: U51.9(400MV)
N167784770: U51.7(200MV)
N167784850: U51.10(800MV)
N167784930: U51.11(1.6V)
N167785400: U51.5(50MV)
N167785673: U51.4(PG)
N167785678: U51.13(NR/SS)
N167798820: U53.6(100MV)
N167798901: U53.2(SNS)
N167798980: U53.7(200MV)
N167799060: U53.9(400MV)
N167799140: U53.11(1.6V)
N167799220: U53.10(800MV)
N167799690: U53.5(50MV)
N167800023: U53.4(PG)
N167800028: U53.13(NR/SS)
N167827310: U52.6(100MV)
N167827391: U52.2(SNS)
N167827470: U52.7(200MV)
N167827550: U52.9(400MV)
N167827630: U52.11(1.6V)
N167827710: U52.10(800MV)
N167828180: U52.5(50MV)
N167828513: U52.4(PG)
N167828518: U52.13(NR/SS)

Pads without a net: D1 2 4 7 8 9; D2 2 4 7 8 9; D3 2 4 7 8 9; D4 2 4 7 8 9; D7 2 4 7 8 9; D8 2 4 7 8 9; D9 2 4 7 8 9; D10 2 4 7 8 9; D13 2 4 7 8 9; D14 2 4 7 8 9; D15 2 4 7 8 9; D16 2 4 7 8 9; D17 2 4 7 8 9; D18 2 4 7 8 9; D19 2 4 7 8 9; D20 2 4 7 8 9; J10 A2 A4 A6 A8 A10 A14 A22 B1 B3 B5 B7; J12 A2 A4 A6 A8 A22 B1 B3 B9 B25; U3 36 37 38 39 40 41 42 43 44 45 46 47 48 49 50 51 52 53 54 55 56 57 61 62 63 64 66 76 78 80 84 90 92 93 94 95 102 108 114 116 118 119 160 180 185 187 188 189 191 193 195 197 198 199 210 212 214 216 218 220 222 224 226 230 232; U10 36 37 38 39 40 41 42 43 44 45 46 47 48 49 50 51 52 53 54 55 56 57 61 62 63 64 66 76 78 80 84 90 92 93 94 95 102 108 114 116 118 119 160 180 185 187 188 189 191 193 195 197 198 199 210 212 214 216 218 220 222 224 226 230 232; U11 7; U13 5 6 7; U55 6 7 9 11 12 13 14

## Via types
v1: diameter 0.406, hole 0.203, TOP to BOTTOM, 156 vias

## Routing (per net, layer and track width the routed paths; a pad name or vN(x,y) marks a point on that pad's centre or on a via; arc(x,y) is an arc through that point)
3.3V_A: length 28
  TOP w0.152: U3.217 v1(72.16,99.98) ; U10.223 v1(78.31,202.36) ; U10.196 v1(91.81,202.41) ; U10.227 v1(76.31,202.41) ; U3.115 v1(87.66,64.57) ; U10.73 v1(75.81,167.02) ; U10.190 v1(94.81,202.42) ; U3.91 v1(75.66,64.46) ; U10.79 v1(78.81,167.01) ; U10.213 v1(83.31,200.23) ; U3.204 v1(78.66,100) ; U3.103 v1(81.66,64.59) ; U10.91 v1(84.81,166.92) ; U10.115 v1(96.81,167.04) ; U3.227 v1(67.16,100.06) ; U3.213 v1(74.16,99.97) ; U10.217 v1(81.31,200.25) ; U3.79 v1(69.66,64.53) ; U3.196 v1(82.66,99.99) ; U3.105 v1(82.66,64.58) ; U10.105 v1(91.81,167.02) ; U3.73 v1(66.66,64.53) ; U10.204 v1(87.81,202.36) ; U10.103 v1(90.81,166.96) ; U3.223 v1(69.16,100) ; U3.190 v1(85.66,100.14)
3.3V_D: length 20.6
  TOP w0.152: U3.184 v1(88.66,100.04) ; U10.173 v1(102.54,195.98) ; U10.126 v1(102.33,172.48) ; U3.205 v1(78.16,100.4) ; U3.109 v1(84.66,64.56) ; U3.125 93.29,69.55 v1(93.45,69.7) 93.1,70.05 U3.126 ; U10.184 v1(97.81,202.53) ; U10.109 v1(93.81,167.01) ; U10.153 v1(102.16,185.98) ; U10.205 v1(87.31,202.9) ; v1(93.37,83.77) 93.15,83.55 U3.153 ; U10.125 v1(102.31,171.98) ; U10.128 v1(102.16,173.48) ; U3.173 v1(94,93.55) ; U3.128 v1(93.55,71.05)
3.3V_PA: length 19.5
  TOP w0.152: U10.67 v1(72.81,166.92) ; U10.58 v1(66.72,170.98) ; U10.229 v1(75.31,202.38) ; U3.1 57.9,97.05 v1(57.51,96.65) ; U3.60 v1(58.76,66.85) ; U10.3 v1(66.68,198.48) ; U10.30 v1(66.7,184.98) ; U3.3 v1(57.54,96.05) ; v1(57.07,83.19) 57.71,82.55 U3.30 ; U3.229 v1(66.16,100.05) ; U10.1 v1(66.66,199.48) ; U10.60 v1(66.78,169.98) ; U3.234 v1(63.66,99.94) ; U3.58 v1(56.88,68.55) ; U3.67 v1(63.66,64.66) ; U10.234 v1(72.81,202.48)
GND: length 102.5
  TOP w0.152: U10.186 v1(96.81,200.31) ; U3.130 v1(94.02,72.05) ; U10.207 v1(86.31,202.69) ; U10.89 v1(83.81,169.1) ; U3.68 v1(64.16,66.75) ; U10.182 v1(98.81,200.23) ; U3.152 93.51,83.05 v1(93.52,83.03) ; U3.101 80.66,64.85 v1(81.03,64.49) ; U3.137 v1(93.2,75.55) ; U10.75 v1(76.81,169.14) ; U10.206 v1(86.81,202.35) ; U10.137 v1(100.03,177.98) ; U3.75 v1(67.66,66.73) ; U10.117 v1(97.81,169.05) ; U10.151 v1(100,184.98) ; U3.99 v1(79.66,66.79) ; U10.71 v1(74.81,169.12) ; U3.231 v1(65.16,100.04) ; U10.59 v1(69.06,170.48) ; U3.31 v1(56.47,82.05) ; U3.200 v1(80.66,99.97) ; U3.71 v1(65.66,66.8) ; U10.123 v1(100.14,170.98) ; v1(93.93,94.28) 93.69,94.05 U3.174 ; U10.194 v1(92.81,200.33) ; U10.211 v1(84.31,202.51) ; U3.117 v1(88.66,64.58) ; U3.111 v1(85.66,64.53) ; U10.107 v1(92.81,169.21) ; U3.113 v1(86.66,64.54) ; U3.127 v1(93.26,70.55) ; U3.131 v1(94.18,72.55) ; U3.89 v1(74.66,66.69) ; U3.178 v1(93.06,96.05) ; U10.152 v1(99.99,185.48) ; U10.219 v1(80.31,202.47) ; U10.225 v1(77.31,200.34) ; U3.192 v1(84.66,100) ; U10.201 v1(89.31,202.49) ; U3.124 93.69,69.05 v1(93.88,68.86) 93.56,68.55 U3.123 ; U10.68 v1(73.31,169.24) ; U3.221 v1(70.16,99.94) ; U10.31 v1(69.02,184.48) ; U10.122 v1(102.31,170.48) ; U3.206 v1(77.66,99.91) ; U3.85 v1(72.66,66.71) ; U10.127 v1(100.09,172.98) ; U3.219 v1(71.16,99.96) ; U3.2 v1(59.79,96.55) ; U3.186 v1(87.66,100.15) ; U10.202 v1(88.81,200.34) ; U10.130 v1(100.11,174.48) ; U3.107 v1(83.66,64.55) ; U10.100 v1(89.31,169.39) ; U10.99 v1(88.81,169.32) ; U3.209 v1(76.16,100.04) ; U10.85 v1(81.81,169.04) ; U3.100 v1(80.16,64.64) ; U3.59 57.28,68.05 v1(56.87,67.64) ; U3.207 v1(77.16,99.98) ; U3.233 v1(64.16,100.3) ; U10.113 v1(95.81,169.09) ; U10.231 v1(74.31,200.24) ; v1(90.5,83.08) 91.04,82.55 U3.151 ; U3.215 v1(73.16,99.99) ; U10.131 v1(100.11,174.98) ; U10.215 v1(82.31,202.45) ; U10.124 v1(100.09,171.48) ; U3.122 v1(93.95,68.05) ; U10.101 v1(89.81,169.08) ; U10.2 v1(68.96,198.98) ; U3.201 v1(80.16,99.97) ; U10.233 v1(73.31,200.31) ; U10.209 v1(85.31,202.43) ; U10.174 v1(100.12,196.48) ; U3.211 v1(75.16,100.07) ; U10.200 v1(89.81,200.4) ; U3.225 v1(68.16,100.04) ; U3.194 v1(83.66,99.98) ; U10.192 v1(93.81,200.28) ; U10.111 v1(94.81,169.08) ; U10.178 v1(100.11,198.48) ; U10.221 v1(79.31,202.48) ; U3.182 v1(89.66,100.15) ; U3.202 v1(79.66,100.02)
VDD_TEST: length 2.8
  TOP w0.152: v1(88.16,200.33) 88.31,200.47 U10.203 ; U3.203 v1(79.16,100.59)
VDDD_TEST: length 2.6
  TOP w0.152: U10.172 v1(100.17,195.48) ; U3.172 92.93,93.05 v1(93.42,92.56)
N32240: length 68.2
  TOP w0.152: 73.29,38.11 99.72,64.54 99.72,86.33 96.51,89.55 U3.165
N32417: length 26.2
  TOP w0.152: U3.121 92.06,62.78 76.89,47.6
N32439: length 34
  TOP w0.152: 68.55,40.56 90.16,62.17 U3.120
N32565: length 29.3
  TOP w0.152: U3.135 97.56,74.55 v1(99.24,72.87)
  BOTTOM w0.152: R19.1 98.55,73.56 v1(99.24,72.87) 99.34,72.87 104.57,67.64 104.57,55.75 104.9,55.42
N32577: length 35.9
  TOP w0.152: v1(99.16,71.83) 96.95,74.05 U3.134
  BOTTOM w0.152: R16.1 98.7,72.29 v1(99.16,71.83) 102.57,68.43 102.57,46.61
N32589: length 25.9
  TOP w0.152: v1(98.98,74.42) 98.36,75.05 U3.136
  BOTTOM w0.152: R22.1 99.59,75.03 v1(98.98,74.42) 98.98,74.32 105,68.3 105,59.51
N32601: length 61.7
  TOP w0.152: U3.133 96,73.55 v1(99.09,70.46)
  BOTTOM w0.152: 100.53,19.61 101.85,20.93 101.85,67.69 v1(99.09,70.46) 98.81,70.74 R14.1
N32613: length 59.2
  TOP w0.152: v1(99.11,69.39) 95.46,73.05 U3.132
  BOTTOM w0.152: 98.32,20.75 99.92,22.35 99.92,68.63 99.16,69.39 v1(99.11,69.39) 98.88,69.16 R13.1
N32625: length 54.2
  TOP w0.152: v1(98.73,67.84) 95.03,71.55 U3.129
  BOTTOM w0.152: 97.41,23.67 98.73,24.99 v1(98.73,67.84) 98.45,67.56 R18.1
N36138: length 6.8
  TOP w0.102: 97.79,77.04 96.49,77.04 96.39,77.14 R15.2
  TOP w0.152: R15.2 95.24,76.55 U3.139
N36150: length 6.4
  TOP w0.102: 97.79,76.83 96.49,76.83 96.39,76.73 R15.1
  TOP w0.152: R15.1 96.26,76.05 U3.138
N36162: length 5.5
  TOP w0.152: U3.143 92.08,78.56 92.91,78.56 93.65,79.3 93.65,79.63 95.22,81.2 R20.2
N36174: length 5.2
  TOP w0.152: U3.142 92.08,78.03 93.07,78.03 94.06,79.02 94.06,79.53 94.21,79.68 R20.1
N36186: length 3.4
  TOP w0.152: U3.141 93.24,77.55 94.67,78.97 R17.2
N36198: length 2.9
  TOP w0.152: R17.1 94.44,77.05 U3.140
N36210: length 5.2
  TOP w0.152: U3.149 93.66,81.55 v1(95.55,83.44)
  BOTTOM w0.152: R23.2 96.04,83.92 v1(95.55,83.44)
N36222: length 4.7
  TOP w0.152: U3.148 94.15,81.05 v1(95.5,82.4)
  BOTTOM w0.152: v1(95.5,82.4) R23.1
N36234: length 4.3
  TOP w0.152: v1(93.32,80.04) 92.07,80.04 U3.146
  BOTTOM w0.152: R21.2 94.18,80.9 v1(93.32,80.04)
N36246: length 4
  TOP w0.152: v1(93.14,79.48) 93.07,79.55 U3.145
  BOTTOM w0.152: v1(93.14,79.48) 93.22,79.48 93.32,79.38 R21.1
